# EAGLE board driver_board_v5_2tubes (EAGLE 6.5.0)
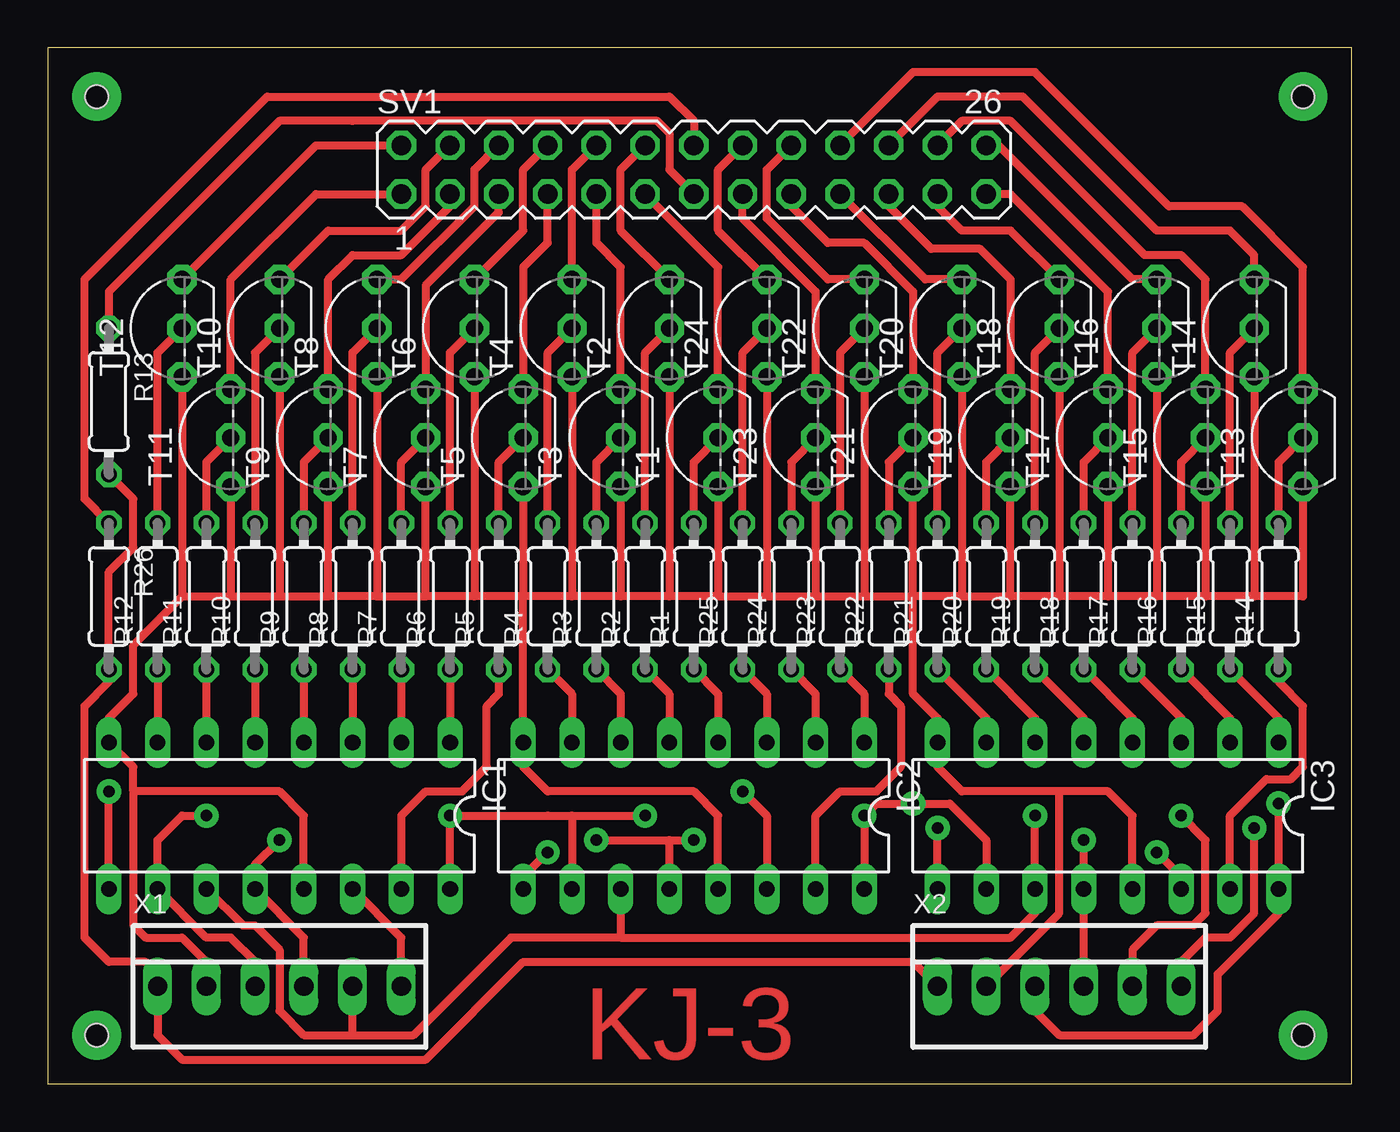
[diagram p0: board, top side]
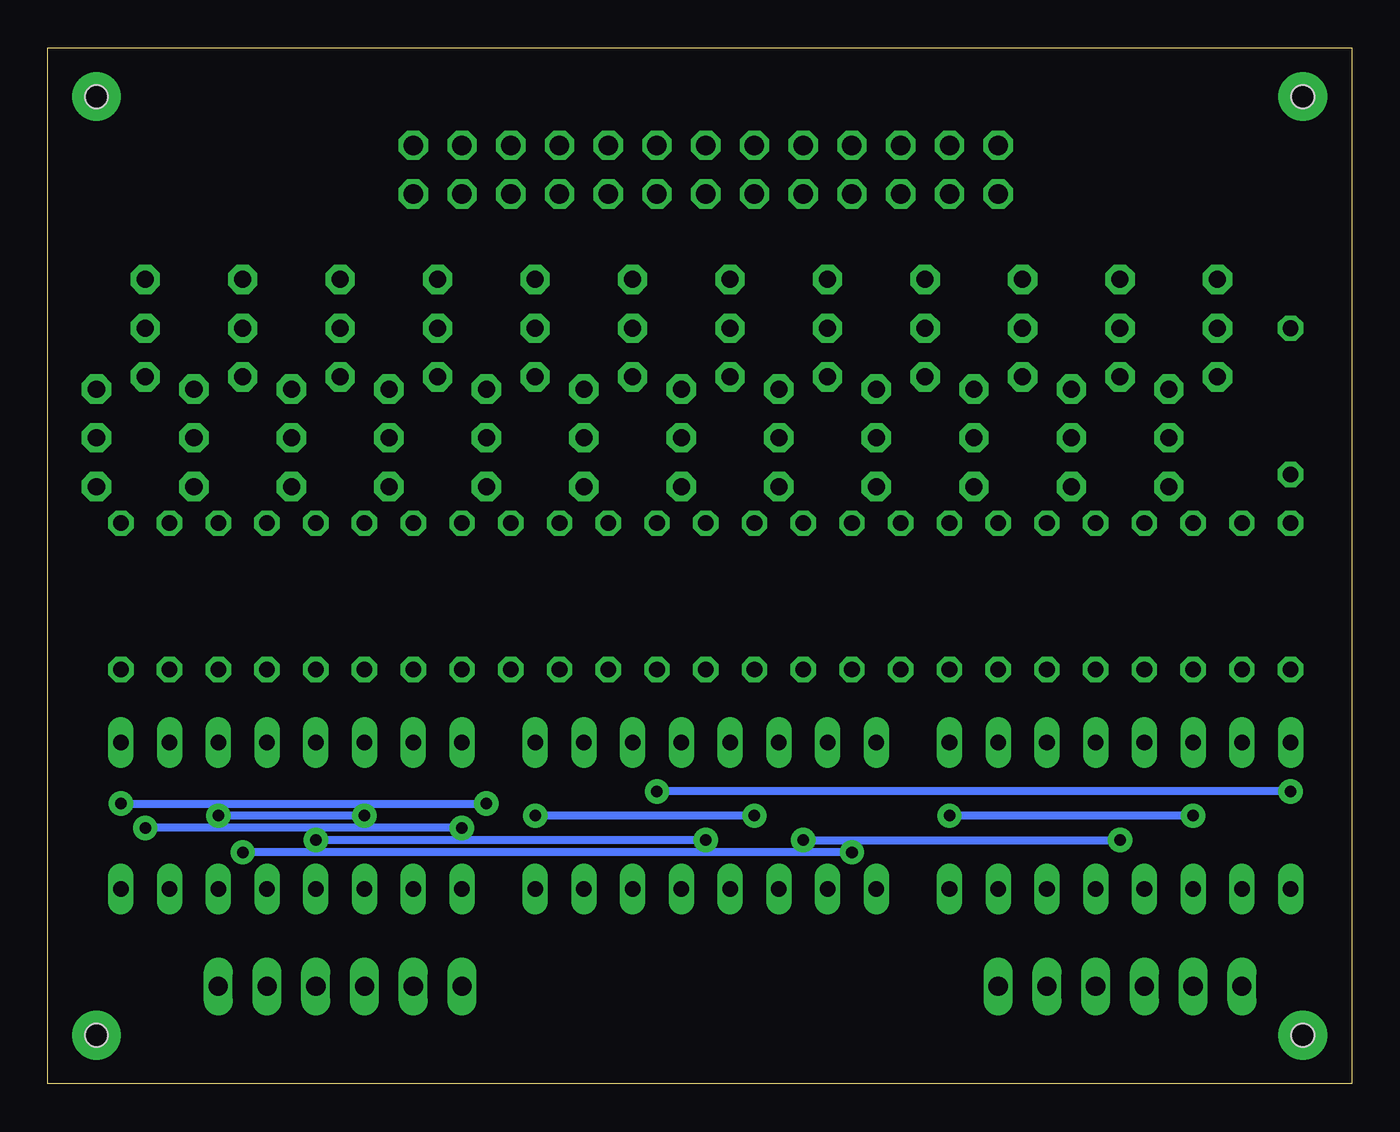
[diagram p1: board, bottom side, seen from below]

Size 67.93 x 53.97 mm. Coordinates in mm from the lower left corner, seen from the top.
Outline: 0,0 67.93,0 67.93,53.97 0,53.97 0,0
Copper layers (1*16): Top 0.035mm / dielectric 1.5mm / Bottom 0.035mm
Design rules "default": minimum track width 10mil, minimum drill 24mil, track to track 8mil, track to pad 8mil, pad to pad 8mil, via to via 8mil, smd to smd 8mil, copper to edge 40mil, drill to drill 8mil, minimum pad ring 10mil, minimum via ring 8mil, stop-mask expansion 4mil, vias tented up to drill 0mil, thermal gap 10mil
Holes 1.2 mm at 2.54,2.54 2.54,51.44 65.41,51.44 65.41,2.54

## Footprints (pad centres in the part's own frame; a part is rotated, then mirrored left to right if it is on the bottom)
DIL16 = drill 0.813 long: 1 -8.89,-3.81; 2 -6.35,-3.81; 3 -3.81,-3.81; 4 -1.27,-3.81; 5 1.27,-3.81; 6 3.81,-3.81; 7 6.35,-3.81; 8 8.89,-3.81; 9 8.89,3.81; 10 6.35,3.81; 11 3.81,3.81; 12 1.27,3.81; 13 -1.27,3.81; 14 -3.81,3.81; 15 -6.35,3.81; 16 -8.89,3.81
0204/7 = drill 0.813 octagon: 1 -3.81,0; 2 3.81,0
MA13-2 = drill 1.016 octagon: 1 -15.24,-1.27; 2 -15.24,1.27; 3 -12.7,-1.27; 4 -12.7,1.27; 5 -10.16,-1.27; 6 -10.16,1.27; 7 -7.62,-1.27; 8 -7.62,1.27; 9 -5.08,-1.27; 10 -5.08,1.27; 11 -2.54,-1.27; 12 -2.54,1.27; 13 0,-1.27; 14 0,1.27; 15 2.54,-1.27; 16 2.54,1.27; 17 5.08,-1.27; 18 5.08,1.27; 19 7.62,-1.27; 20 7.62,1.27; 21 10.16,-1.27; 22 10.16,1.27; 23 12.7,-1.27; 24 12.7,1.27; 25 15.24,-1.27; 26 15.24,1.27
TO92-EBC = drill 0.889 pad 1.524 octagon: B 0,-1.27; C 2.54,-1.27; E -2.54,-1.27
22-23-2061 = drill 1 long: 1 -6.35,0; 2 -3.81,0; 3 -1.27,0; 4 1.27,0; 5 3.81,0; 6 6.35,0

## Placement (x,y rotation side)
IC1  74LS595N  [DIL16]  12.06,13.97 180 top
IC2  74LS595N  [DIL16]  33.66,13.97 180 top
IC3  74LS595N  [DIL16]  55.24,13.97 180 top
R1  [0204/7]  33.66,25.4 90 top
R2  [0204/7]  31.11,25.4 90 top
R3  [0204/7]  28.57,25.4 90 top
R4  [0204/7]  26.04,25.4 90 top
R5  [0204/7]  23.5,25.4 90 top
R6  [0204/7]  20.95,25.4 90 top
R7  [0204/7]  18.41,25.4 90 top
R8  [0204/7]  15.88,25.4 90 top
R9  [0204/7]  13.34,25.4 90 top
R10  [0204/7]  10.79,25.4 90 top
R11  [0204/7]  8.26,25.4 90 top
R12  [0204/7]  5.71,25.4 90 top
R13  [0204/7]  3.17,35.56 270 top
R14  [0204/7]  64.14,25.4 90 top
R15  [0204/7]  61.59,25.4 90 top
R16  [0204/7]  59.05,25.4 90 top
R17  [0204/7]  56.52,25.4 90 top
R18  [0204/7]  53.98,25.4 90 top
R19  [0204/7]  51.44,25.4 90 top
R20  [0204/7]  48.9,25.4 90 top
R21  [0204/7]  46.35,25.4 90 top
R22  [0204/7]  43.81,25.4 90 top
R23  [0204/7]  41.27,25.4 90 top
R24  [0204/7]  38.73,25.4 90 top
R25  [0204/7]  36.2,25.4 90 top
R26  [0204/7]  3.17,25.4 270 top
SV1  [MA13-2]  33.66,47.62 0 top
T1  [TO92-EBC]  33.66,33.66 90 top
T2  [TO92-EBC]  31.11,39.37 90 top
T3  [TO92-EBC]  28.57,33.66 90 top
T4  [TO92-EBC]  26.04,39.37 90 top
T5  [TO92-EBC]  23.5,33.66 90 top
T6  [TO92-EBC]  20.95,39.37 90 top
T7  [TO92-EBC]  18.41,33.66 90 top
T8  [TO92-EBC]  15.88,39.37 90 top
T9  [TO92-EBC]  13.34,33.66 90 top
T10  [TO92-EBC]  10.79,39.37 90 top
T11  [TO92-EBC]  8.26,33.66 90 top
T12  [TO92-EBC]  5.71,39.37 90 top
T13  [TO92-EBC]  64.14,33.66 90 top
T14  [TO92-EBC]  61.59,39.37 90 top
T15  [TO92-EBC]  59.05,33.66 90 top
T16  [TO92-EBC]  56.52,39.37 90 top
T17  [TO92-EBC]  53.98,33.66 90 top
T18  [TO92-EBC]  51.44,39.37 90 top
T19  [TO92-EBC]  48.9,33.66 90 top
T20  [TO92-EBC]  46.35,39.37 90 top
T21  [TO92-EBC]  43.81,33.66 90 top
T22  [TO92-EBC]  41.27,39.37 90 top
T23  [TO92-EBC]  38.73,33.66 90 top
T24  [TO92-EBC]  36.2,39.37 90 top
X1  [22-23-2061]  12.06,5.08 0 top
X2  [22-23-2061]  52.7,5.08 0 top

## Library data of the parts
IC1-IC3 = 74xx-us
R1-R26 = resistor
SV1 = con-lstb; OC_FARNELL: unknown; OC_NEWARK: unknown
T1-T24 = transistor
X1 X2 = con-molex; MF: MOLEX; MPN: 22-23-2061; OC_FARNELL: 1462922; OC_NEWARK: 27C1933

## Nets
GND: IC1.8 IC1.13 IC2.8 IC2.13 IC3.8 IC3.13 T1.E T2.E T3.E T4.E T5.E T6.E T7.E T8.E T9.E T10.E T11.E T12.E T13.E T14.E T15.E T16.E T17.E T18.E T19.E T20.E T21.E T22.E T23.E T24.E X1.2 X2.2
N$1: R12.2 T12.B
N$2: R11.2 T11.B
N$3: R10.2 T10.B
N$4: R9.2 T9.B
N$5: R8.2 T8.B
N$6: R7.2 T7.B
N$7: R6.2 T6.B
N$8: R5.2 T5.B
N$9: R4.2 T4.B
N$10: R3.2 T3.B
N$11: R2.2 T2.B
N$12: R1.2 T1.B
N$13: SV1.11 T1.C
N$16: SV1.3 T9.C
N$17: SV1.6 T8.C
N$18: SV1.5 T7.C
N$20: SV1.12 T2.C
N$21: SV1.9 T3.C
N$22: SV1.8 T6.C
N$23: SV1.7 T5.C
N$24: SV1.10 T4.C
N$25: R26.1 SV1.14
N$26: R25.2 T24.B
N$27: R24.2 T23.B
N$28: R23.2 T22.B
N$29: R22.2 T21.B
N$30: R21.2 T20.B
N$31: R20.2 T19.B
N$32: R19.2 T18.B
N$33: R18.2 T17.B
N$34: R17.2 T16.B
N$35: R16.2 T15.B
N$36: R15.2 T14.B
N$37: R14.2 T13.B
N$38: SV1.16 T24.C
N$39: SV1.15 T23.C
N$40: SV1.18 T22.C
N$41: SV1.17 T21.C
N$42: SV1.19 T20.C
N$43: SV1.21 T19.C
N$44: SV1.20 T13.C
N$45: SV1.22 T14.C
N$46: SV1.24 T15.C
N$47: SV1.23 T18.C
N$48: SV1.25 T17.C
N$49: SV1.26 T16.C
N$50: R13.2 R26.2 X1.1 X2.1
N$51: R13.1 SV1.13
N$52: IC1.9 IC2.14
N$53: IC2.9 IC3.14
N$54: IC3.9 X2.6
N$55: IC1.14 X1.6
N$57: SV1.2 T12.C
N$58: IC1.11 IC2.11 IC3.11 X1.5 X2.5
N$59: IC1.12 IC2.12 IC3.12 X1.4 X2.4
N$60: SV1.1 T11.C
N$61: SV1.4 T10.C
N$75: IC1.7 R12.1
N$76: IC1.6 R11.1
N$77: IC1.5 R10.1
N$78: IC1.4 R9.1
N$79: IC1.3 R8.1
N$80: IC1.2 R7.1
N$81: IC1.1 R6.1
N$82: IC1.15 R5.1
N$84: IC2.7 R4.1
N$85: IC2.6 R3.1
N$86: IC2.5 R2.1
N$87: IC2.4 R1.1
N$88: IC2.3 R25.1
N$89: IC2.2 R24.1
N$90: IC2.1 R23.1
N$91: IC2.15 R22.1
N$92: IC3.7 R21.1
N$93: IC3.6 R20.1
N$94: IC3.5 R19.1
N$95: IC3.4 R18.1
N$96: IC3.3 R17.1
N$97: IC3.2 R16.1
N$98: IC3.1 R15.1
N$99: IC3.15 R14.1
VCC: IC1.10 IC1.16 IC2.10 IC2.16 IC3.10 IC3.16 X1.3 X2.3

## Tracks (layer width: path | path; a pad name or v marks a point on that pad's centre or on a via)
GND
  Top 0.406: T11.E 9.53,25.4 | 9.53,25.4 12.06,25.4 | 12.06,25.4 14.61,25.4 | 14.61,25.4 T9.E | T10.E 12.06,25.4 | T12.E 6.99,25.4 | 6.99,25.4 9.53,25.4 | T8.E 17.14,25.4 | 17.14,25.4 19.68,25.4 | 19.68,25.4 T7.E | T5.E 24.77,25.4 | 24.77,25.4 22.23,25.4 | 22.23,25.4 19.68,25.4 | T3.E 29.84,25.4 | 29.84,25.4 27.3,25.4 | 27.3,25.4 24.77,25.4 | 17.14,25.4 14.61,25.4 | 34.92,25.4 32.38,25.4 | 32.38,25.4 29.84,25.4 | T2.E 32.38,25.4 | T4.E 27.3,25.4 | T6.E 22.23,25.4 | T23.E 40.01,25.4 | 40.01,25.4 42.55,25.4 | 42.55,25.4 45.09,25.4 | 45.09,25.4 T21.E | T22.E 42.55,25.4 | T24.E 37.47,25.4 | 37.47,25.4 40.01,25.4 | T20.E 47.62,25.4 | 47.62,25.4 50.16,25.4 | 50.16,25.4 T19.E | T17.E 55.24,25.4 | 55.24,25.4 52.7,25.4 | 52.7,25.4 50.16,25.4 | T15.E 60.33,25.4 | 60.33,25.4 57.78,25.4 | 57.78,25.4 55.24,25.4 | 47.62,25.4 45.09,25.4 | T13.E 65.41,25.4 62.87,25.4 | 62.87,25.4 60.33,25.4 | T14.E 62.87,25.4 | T16.E 57.78,25.4 | T18.E 52.7,25.4 | 24.77,25.4 IC2.8 24.77,16.51 26.04,15.24 33.66,15.24 34.92,13.97 IC2.13 | 45.09,25.4 45.09,20.32 46.35,19.05 IC3.8 46.35,16.51 47.62,15.24 52.7,15.24 | T1.E 34.92,25.4 | 34.92,25.4 37.47,25.4 | 4.45,15.24 4.45,8.26 5.08,7.62 6.99,7.62 8.26,6.35 X1.2 | IC1.13 13.34,13.97 12.06,15.24 4.45,15.24 | 4.45,15.24 4.45,16.51 IC1.8 3.17,19.05 4.45,20.32 4.45,22.86 6.99,25.4 | IC3.13 56.52,13.97 55.24,15.24 52.7,15.24 | 52.7,15.24 52.7,8.89 X2.2
N$1
  Top 0.406: T12.B 5.71,38.1 R12.2
N$2
  Top 0.406: T11.B 8.26,32.38 R11.2
N$3
  Top 0.406: T10.B 10.79,38.1 R10.2
N$4
  Top 0.406: T9.B 13.34,32.38 R9.2
N$5
  Top 0.406: R8.2 15.88,38.1 T8.B
N$6
  Top 0.406: R7.2 18.41,32.38 T7.B
N$7
  Top 0.406: R6.2 20.95,38.1 T6.B
N$8
  Top 0.406: R5.2 23.5,32.38 T5.B
N$9
  Top 0.406: R4.2 26.04,38.1 T4.B
N$10
  Top 0.406: R3.2 28.57,32.38 T3.B
N$11
  Top 0.406: R2.2 31.11,38.1 T2.B
N$12
  Top 0.406: R1.2 33.66,32.38 T1.B
N$13
  Top 0.406: T1.C 34.92,42.55 SV1.11
N$14  (via drill 1.2 pad 2.54)
  other vias: 2.54,2.54
N$15  (via drill 1.2 pad 2.54)
  other vias: 2.54,51.44
N$16
  Top 0.406: T9.C 14.61,41.91 15.88,43.18 18.41,43.18 20.95,45.72 SV1.3
N$17
  Top 0.406: T8.C 18.41,41.91 22.23,45.72 22.23,47.62 SV1.6
N$18
  Top 0.406: T7.C 19.68,41.59 23.5,45.4 SV1.5
N$19  (via drill 1.2 pad 2.54)
  other vias: 65.41,51.44
N$20
  Top 0.406: T2.C 29.84,44.45 29.84,47.62 SV1.12
N$21
  Top 0.406: T3.C 29.84,42.55 28.57,43.81 SV1.9
N$22
  Top 0.406: T6.C 24.77,44.45 24.77,47.62 SV1.8
N$23
  Top 0.406: T5.C 24.77,42.55 26.04,43.81 SV1.7
N$24
  Top 0.406: T4.C 27.3,47.62 SV1.10
N$25
  Top 0.406: SV1.14 33.66,50.16 32.38,51.44 11.43,51.44 1.91,41.91 1.91,30.48 R26.1
N$26
  Top 0.406: T24.B 36.2,38.1 R25.2
N$27
  Top 0.406: T23.B 38.73,32.38 R24.2
N$28
  Top 0.406: T22.B 41.27,38.1 R23.2
N$29
  Top 0.406: T21.B 43.81,32.38 R22.2
N$30
  Top 0.406: R21.2 46.35,38.1 T20.B
N$31
  Top 0.406: R20.2 48.9,32.38 T19.B
N$32
  Top 0.406: R19.2 51.44,38.1 T18.B
N$33
  Top 0.406: R18.2 53.98,32.38 T17.B
N$34
  Top 0.406: R17.2 56.52,38.1 T16.B
N$35
  Top 0.406: R16.2 59.05,32.38 T15.B
N$36
  Top 0.406: R15.2 61.59,38.1 T14.B
N$37
  Top 0.406: R14.2 64.14,32.38 T13.B
N$38
  Top 0.406: T24.C 34.92,44.45 34.92,47.62 SV1.16
N$39
  Top 0.406: T23.C 40.01,41.27 36.2,45.09 SV1.15
N$40
  Top 0.406: T22.C 40.64,41.91 37.47,45.09 37.47,47.62 SV1.18
N$41
  Top 0.406: T21.C 45.09,41.27 42.55,43.81 40.64,43.81 38.73,45.72 SV1.17
N$42
  Top 0.406: T20.C 45.72,41.91 SV1.19
N$43
  Top 0.406: T19.C 50.16,41.91 48.58,43.5 46.04,43.5 43.81,45.72 SV1.21
N$44
  Top 0.406: T13.C 65.41,42.55 62.23,45.72 58.42,45.72 51.44,52.7 45.09,52.7 SV1.20
N$45
  Top 0.406: T14.C 62.87,43.18 61.59,44.45 57.78,44.45 50.8,51.44 46.35,51.44 SV1.22
N$46
  Top 0.406: T15.C 60.33,41.91 59.05,43.18 57.15,43.18 50.16,50.16 47.62,50.16 SV1.24
N$47
  Top 0.406: T18.C 50.16,44.45 47.62,44.45 46.35,45.72 SV1.23
N$48
  Top 0.406: T17.C 55.24,41.27 50.16,46.35 SV1.25
N$49
  Top 0.406: T16.C 56.52,41.91 49.53,48.9 SV1.26
N$50
  Top 0.406: X2.1 45.09,6.35 24.77,6.35 19.68,1.27 6.99,1.27 5.71,2.54 X1.1 5.71,5.71 5.08,6.35 3.17,6.35 1.91,7.62 1.91,19.68 3.17,20.95 R26.2 3.17,26.67 4.45,27.94 4.45,30.48 R13.2
N$51
  Top 0.406: SV1.13 32.38,47.62 32.38,49.53 31.75,50.16 15.88,50.16 12.06,50.16 3.17,41.27 R13.1
N$52  (via drill 0.6 pad 1.27)
  Top 0.406: IC1.9 v3.17,15.24 | v36.2,15.24 37.47,13.97 IC2.14
  Bottom 0.406: v3.17,15.24 v36.2,15.24
N$53  (via drill 0.6 pad 1.27)
  Top 0.406: IC2.9 24.77,10.79 v26.04,12.06 | IC3.14 59.05,10.79 v57.78,12.06
  Bottom 0.406: v26.04,12.06 v57.78,12.06
N$54  (via drill 0.6 pad 1.27)
  Top 0.406: IC3.9 v46.35,13.34 | v62.87,13.34 62.87,8.89 61.59,7.62 60.33,7.62 59.05,6.35 X2.6
  Bottom 0.406: v46.35,13.34 v62.87,13.34
N$55
  Top 0.406: X1.6 18.41,7.62 IC1.14
N$57
  Top 0.406: T12.C 13.97,48.9 SV1.2
N$58  (via drill 0.6 pad 1.27)
  Top 0.406: IC1.11 10.16,8.26 10.79,8.26 12.06,6.99 12.06,3.81 13.34,2.54 15.88,2.54 | 15.88,2.54 X1.5 | 29.84,7.62 24.13,7.62 19.05,2.54 15.88,2.54 | IC2.11 29.84,7.62 | 29.84,7.62 50.16,7.62 51.44,8.89 IC3.11 v51.44,13.97 | v59.05,13.97 60.33,12.7 60.33,8.89 59.69,8.26 57.78,8.26 56.52,6.99 X2.5
  Bottom 0.406: v51.44,13.97 v59.05,13.97
N$59  (via drill 0.6 pad 1.27)
  Top 0.406: X1.4 13.34,7.62 IC1.12 10.79,11.43 v12.06,12.7 | IC2.12 32.38,12.7 | v28.57,12.7 32.38,12.7 | 32.38,12.7 v33.66,12.7 | v53.98,12.7 IC3.12 X2.4
  Bottom 0.406: v28.57,12.7 v12.06,12.7 | v33.66,12.7 v53.98,12.7
N$60
  Top 0.406: T11.C 9.53,41.91 13.97,46.35 SV1.1
N$61
  Top 0.406: T10.C 14.61,44.45 18.41,44.45 19.68,45.72 19.68,47.62 SV1.4
N$62  (via drill 1.2 pad 2.54)
  other vias: 65.41,2.54
N$75
  Top 0.406: R12.1 IC1.7
N$76
  Top 0.406: R11.1 IC1.6
N$77
  Top 0.406: R10.1 IC1.5
N$78
  Top 0.406: R9.1 IC1.4
N$79
  Top 0.406: R8.1 IC1.3
N$80
  Top 0.406: R7.1 IC1.2
N$81
  Top 0.406: R6.1 IC1.1
N$82
  Top 0.406: R5.1 23.5,20.32 22.86,19.68 22.86,16.51 21.59,15.24 19.68,15.24 18.41,13.97 IC1.15 18.41,11.43
N$84
  Top 0.406: R4.1 27.3,20.32 IC2.7
N$85
  Top 0.406: R3.1 29.84,20.32 IC2.6
N$86
  Top 0.406: R2.1 32.38,20.32 IC2.5
N$87
  Top 0.406: R1.1 34.92,20.32 IC2.4
N$88
  Top 0.406: R25.1 37.47,20.32 IC2.3
N$89
  Top 0.406: R24.1 40.01,20.32 IC2.2
N$90
  Top 0.406: R23.1 42.55,20.32 IC2.1
N$91
  Top 0.406: R22.1 43.81,20.32 44.45,19.68 44.45,16.51 43.18,15.24 41.27,15.24 40.01,13.97 IC2.15
N$92
  Top 0.406: R21.1 48.9,19.05 IC3.7
N$93
  Top 0.406: R20.1 51.44,19.05 IC3.6
N$94
  Top 0.406: R19.1 53.98,19.05 IC3.5
N$95
  Top 0.406: R18.1 56.52,19.05 IC3.4
N$96
  Top 0.406: R17.1 59.05,19.05 IC3.3
N$97
  Top 0.406: R16.1 61.59,19.05 IC3.2
N$98
  Top 0.406: R15.1 64.14,19.05 IC3.1
N$99
  Top 0.406: R14.1 64.14,20.95 65.41,19.68 65.41,16.51 64.77,15.88 63.5,15.88 61.59,13.97 IC3.15
VCC  (via drill 0.6 pad 1.27)
  Top 0.406: X1.3 10.79,6.35 9.53,7.62 8.26,7.62 IC1.10 5.71,12.7 6.99,13.97 v8.26,13.97 | IC1.16 v20.95,13.97 | v20.95,13.97 26.04,13.97 | 27.3,13.97 IC2.10 | IC2.16 v42.55,13.97 43.18,14.61 v45.09,14.61 46.99,14.61 48.9,12.7 IC3.10 | v20.95,13.97 27.3,13.97 | 27.3,13.97 v31.11,13.97 | v64.14,14.61 IC3.16 64.14,8.89 60.96,5.71 60.96,3.81 59.69,2.54 52.7,2.54 51.44,3.81 X2.3
  Bottom 0.406: v8.26,13.97 v20.95,13.97 | v31.11,13.97 v42.55,13.97 | v64.14,14.61 v45.09,14.61

## Text on the board
Top: KJ-3